# Altium PCB uart-v0.PcbDoc
Units mm, origin at the board's own origin, x right, y up, seen from the top; angles counter-clockwise.
Board outline 22.86 x 29.46 mm, 2 copper layers (Top Layer, Bottom Layer); 48 components, 15 nets, 143 pads, 0 vias.
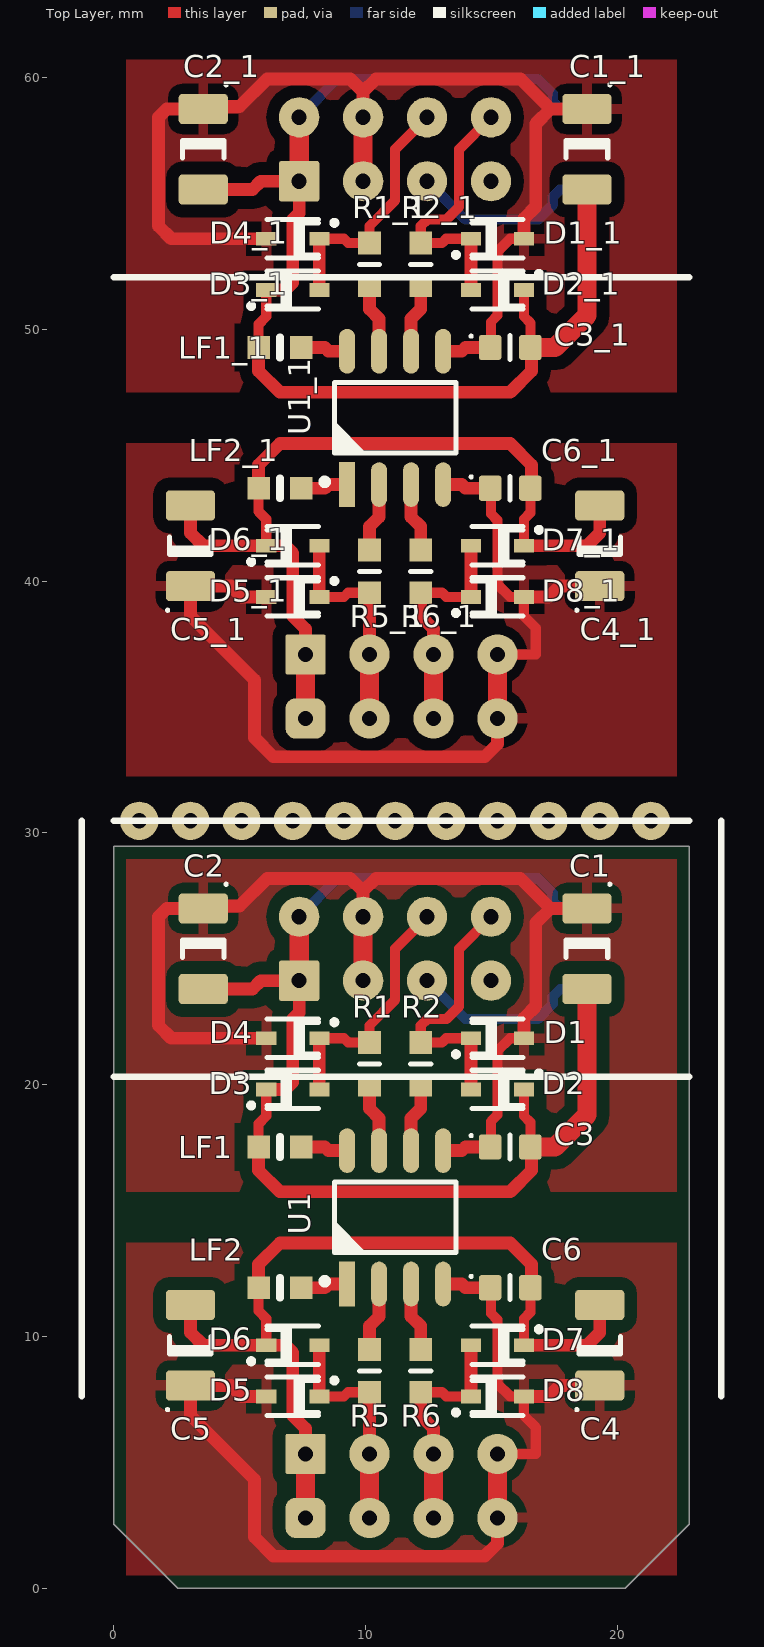
[diagram p0: Top Layer view]
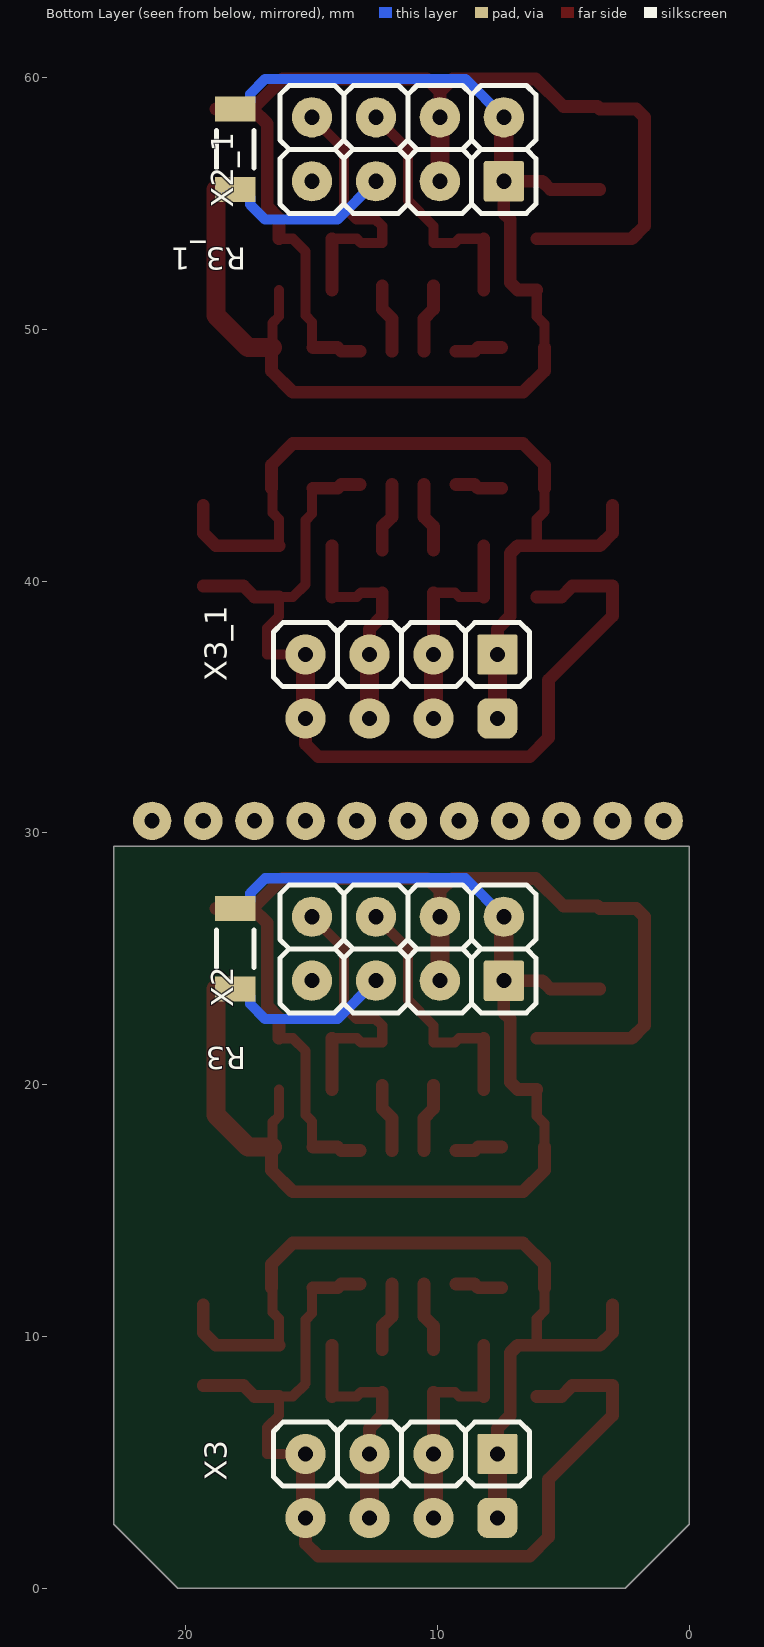
[diagram p1: Bottom Layer view, seen from below]

## Layer stack, top to bottom
Top Solder: solder mask 0.0102, Solder Resist, Dk 3.5
Top Layer: signal copper 0.0356
Dielectric 1: dielectric 0.32, FR-4, Dk 4.8
Bottom Layer: signal copper 0.0356
Bottom Solder: solder mask 0.0102, Solder Resist, Dk 3.5

## Board outline
0,2.54 0,29.464 22.86,29.464 22.86,2.54 20.32,0 2.54,0

## Design rules (kind name [scope] priority, off if disabled: settings)
Clearance [All] p1: gap=0.508 ignorepadtopadclearanceinfootprint=FALSE except(0: Arc-Hole Track-Hole SMDPad-Hole THPad-Hole Via-Hole Fill-Hole Poly-Hole Region-Hole Text-Hole; 0.254: Arc-SMDPad Arc-THPad Arc-Via Arc-Text Track-SMDPad Track-THPad Track-Via Track-Text SMDPad-SMDPad SMDPad-THPad SMDPad-Via SMDPad-Text THPad-THPad THPad-Via THPad-Text Via-Via Via-Text Fill-Text Poly-Text Region-Text Text-Text; 0.3: Arc-Arc Arc-Track Track-Track)
PolygonConnect [All] p1: connectstyle=Relief reliefconductorwidth=0.4 reliefentries=4 polygonreliefangle="90 Angle" airgapwidth=0.4
RoomDefinition uart-cut [InComponentClass('uart-cut')] p1: confinementstyle=ConfineOut formatcopy=TRUE lockcomponents=FALSE outline 97.663,-59.436 140.97,-59.436 140.97,-15.24 97.663,-15.24
RoutingVias [All] p1: holewidth=0.711 width=1.27 viastyle="Through Hole" minholewidth=0.711 minwidth=1.27 maxholewidth=0.711 maxwidth=1.27
SolderMaskExpansion [All] p1: expansion=0.102
Width [All] p1: maxlimit=2.54 minlimit=0.254 preferedwidth=0.508
30 further rules are at their usual default settings.

## Classes and differential pairs
component class uart-cut: C1 C2 C3 C4 C5 C6 D1 D2 D3 D4 D5 D6 D7 D8 LF1 LF2 R1 R2 R3 R5 R6 U1 X2 X3

## Components (designator, comment, footprint, x,y, rotation, side; value= is the part's Value field where it differs from the comment)
C1 "C12064.7u" CAP1206P 18.796,25.4 r270 top value=4.7u
C1_1 "C12064.7u" CAP1206P 18.796,57.15 r270 top value=4.7u (schematic designator C1)
C2 "C12064.7u" CAP1206P 3.556,25.4 r270 top value=4.7u
C2_1 "C12064.7u" CAP1206P 3.556,57.15 r270 top value=4.7u (schematic designator C2)
C3 "C0603100n" CAP0603P 15.748,17.526 r0 top value=100n
C3_1 "C0603100n" CAP0603P 15.748,49.276 r0 top value=100n (schematic designator C3)
C4 "C12064.7u" CAP1206P 19.304,9.652 r90 top value=4.7u
C4_1 "C12064.7u" CAP1206P 19.304,41.402 r90 top value=4.7u (schematic designator C4)
C5 "C12064.7u" CAP1206P 3.048,9.652 r90 top value=4.7u
C5_1 "C12064.7u" CAP1206P 3.048,41.402 r90 top value=4.7u (schematic designator C5)
C6 "C0603100n" CAP0603P 15.748,11.938 r0 top value=100n
C6_1 "C0603100n" CAP0603P 15.748,43.688 r0 top value=100n (schematic designator C6)
D1 "1N4148WS" DIOD-SOD323-2-A_V 15.24,19.812 r0 top value=100V
D1_1 "1N4148WS" DIOD-SOD323-2-A_V 15.24,51.562 r0 top value=100V (schematic designator D1)
D2 "1N4148WS" DIOD-SOD323-2-A_V 15.24,21.844 r180 top value=100V
D2_1 "1N4148WS" DIOD-SOD323-2-A_V 15.24,53.594 r180 top value=100V (schematic designator D2)
D3 "1N4148WS" DIOD-SOD323-2-A_V 7.112,19.812 r180 top value=100V
D3_1 "1N4148WS" DIOD-SOD323-2-A_V 7.112,51.562 r180 top value=100V (schematic designator D3)
D4 "1N4148WS" DIOD-SOD323-2-A_V 7.112,21.844 r0 top value=100V
D4_1 "1N4148WS" DIOD-SOD323-2-A_V 7.112,53.594 r0 top value=100V (schematic designator D4)
D5 "1N4148WS" DIOD-SOD323-2-A_V 7.112,9.652 r180 top value=100V
D5_1 "1N4148WS" DIOD-SOD323-2-A_V 7.112,41.402 r180 top value=100V (schematic designator D5)
D6 "1N4148WS" DIOD-SOD323-2-A_V 7.112,7.62 r0 top value=100V
D6_1 "1N4148WS" DIOD-SOD323-2-A_V 7.112,39.37 r0 top value=100V (schematic designator D6)
D7 "1N4148WS" DIOD-SOD323-2-A_V 15.24,9.652 r0 top value=100V
D7_1 "1N4148WS" DIOD-SOD323-2-A_V 15.24,41.402 r0 top value=100V (schematic designator D7)
D8 "1N4148WS" DIOD-SOD323-2-A_V 15.24,7.62 r180 top value=100V
D8_1 "1N4148WS" DIOD-SOD323-2-A_V 15.24,39.37 r180 top value=100V (schematic designator D8)
LF1 "FB0603100R" IND0603 6.604,17.526 r0 top value=100R
LF1_1 "FB0603100R" IND0603 6.604,49.276 r0 top value=100R (schematic designator LF1)
LF2 "FB0603100R" IND0603 6.604,11.938 r0 top value=100R
LF2_1 "FB0603100R" IND0603 6.604,43.688 r0 top value=100R (schematic designator LF2)
R1 "R060310R" RES0603 10.16,20.828 r270 top value=10R
R1_1 "R060310R" RES0603 10.16,52.578 r270 top value=10R (schematic designator R1)
R2 "R060310R" RES0603 12.192,20.828 r270 top value=10R
R2_1 "R060310R" RES0603 12.192,52.578 r270 top value=10R (schematic designator R2)
R3 "R120610k" RES1206 18.034,25.4 r270 bottom value=10k
R3_1 "R120610k" RES1206 18.034,57.15 r270 bottom value=10k (schematic designator R3)
R5 "R060310R" RES0603 10.16,8.636 r270 top value=10R
R5_1 "R060310R" RES0603 10.16,40.386 r270 top value=10R (schematic designator R5)
R6 "R060310R" RES0603 12.192,8.636 r270 top value=10R
R6_1 "R060310R" RES0603 12.192,40.386 r270 top value=10R (schematic designator R6)
U1 "ADUM1201" SOIC-8 11.176,14.732 r90 top
U1_1 "ADUM1201" SOIC-8 11.176,46.482 r90 top (schematic designator U1)
X2 "DS1021-2x4" PLS-2X4 11.176,25.4 r0 bottom value="2.54 mm"
X2_1 "DS1021-2x4" PLS-2X4 11.176,57.15 r0 bottom value="2.54 mm" (schematic designator X2)
X3 "DS1021-1x4" PLS-1X4 11.43,5.334 r0 bottom value="2.54 mm"
X3_1 "DS1021-1x4" PLS-1X4 11.43,37.084 r0 bottom value="2.54 mm" (schematic designator X3)

## Footprints (in the part's own frame and the unit in brackets; to place one, negate y for a bottom-side part, rotate by r counter-clockwise, add the part's x,y. Pads: shape width x height; smd on the part's side, far side on the other; paste and mask are expansions set on the pad)
CAP0603P [mm] "Chip Capacitor, 2-Leads, Body 1,60x0,80mm, IPC Medium Density"
  rrect25% 0.9x1 smd: 1(-0.8,0) 2(0.8,0)
  silkscreen extent -1.6,-0.48 0,0.5, body extent -0.85,-0.45 0.85,0.45, height 0.9
CAP1206P [mm] "Chip Capacitor, 2-Leads, Body 3,20x1,60mm, IPC Medium Density"
  rrect25% 1.2x1.95 smd: 1(-1.6,0) 2(1.6,0)
  silkscreen extent -2.61,-0.82 0.35,0.96, body extent -1.7,-0.9 1.7,0.9, height 1.8
DIOD-SOD323-2-A_V [mm]
  rect 0.8x0.55 smd: 1(-1.055,0) 2(1.055,0)
  silkscreen extent -1.02,-0.76 1.75,0.76, body extent -0.85,-0.65 0.85,0.65, height 1
IND0603 [mm] "Chip Inductor, 2-Leads, Body 1,75x0,95mm, IPC Medium Density"
  rect 0.9x0.9 smd: 1(-0.85,0) 2(0.85,0)
  silkscreen extent 0,-0.4 0,0.4, body extent -0.87,-0.4 0.87,0.4, height 0.9
PLS-1X4 [mm]
  rrect10% 1.6x1.6 hole 0.6: 1(-3.81,0)
  round 1.6 hole 0.6: 2(-1.27,0) 3(1.27,0) 4(3.81,0)
  silkscreen extent -5.08,-1.26 5.09,1.28, body extent -5.08,-1.26 5.09,1.28, height 8.5
PLS-2X4 [mm]
  rrect10% 1.6x1.6 hole 0.6: 1(-3.81,1.27)
  round 1.6 hole 0.6: 2(-3.81,-1.27) 3(-1.27,1.27) 4(-1.27,-1.27) 5(1.27,1.27) 6(1.27,-1.27) 7(3.81,1.27) 8(3.81,-1.27)
  silkscreen extent -5.08,-2.53 5.09,2.55, body extent -5.08,-2.53 5.09,2.55, height 8.5
RES0603 [mm] "Chip Resistor, 2-Leads, Body 1,75x0,95mm, IPC Medium Density"
  rect 0.9x0.9 smd: 1(-0.85,0) 2(0.85,0)
  silkscreen extent 0,-0.4 0,0.4, body extent -0.87,-0.4 0.87,0.4, height 0.55
RES1206 [mm] "Chip Resistor, 2-Leads, Body 3,13x1,55mm, IPC Medium Density"
  rect 1x1.6 smd: 1(-1.6,0) 2(1.6,0)
  silkscreen extent -0.75,-0.75 0.75,0.75, body extent -1.63,-0.8 1.63,0.8, height 0.7
SOIC-8 [mm] "SOIC, 8-Leads, Body 4,90x3,95mm, Pitch 1,27mm, IPC Medium Density"
  rect 1.778x0.635 smd: 1(-2.65,1.905)
  oval 1.778x0.635 smd: 2(-2.65,0.635) 3(-2.65,-0.635) 4(-2.65,-1.905) 5(2.65,-1.905) 6(2.65,-0.635) 7(2.65,0.635) 8(2.65,1.905)
  silkscreen extent -2.66,-2.41 1.4,2.92, body extent -2.03,-2.41 2.03,2.41, height 1.7

## Part data
C1 C1_1 C2 C2_1 C4 C4_1 C5 C5_1: library part C1206, "C1206 10% 25V", Manufacturer=Yageo, ManufacturerPartNumber=CC1206KKX7R9BB475, Package=1206, Power/Voltage=50V, Tolerance=10%, Category=Capacitor, Name=C1206, Pads=2
C3 C3_1 C6 C6_1: library part C0603, "C0603 10% 25V", Manufacturer=Yageo, ManufacturerPartNumber=CC0603KRX5R8BB104, Package=0603, Power/Voltage=25V, Tolerance=10%, Category=Capacitor, Name=C0603, Pads=2
D1 D1_1 D2 D2_1 D3 D3_1 D4 D4_1 D5 D5_1 D6 D6_1 D7 D7_1 D8 D8_1: "Fast Switching Diode, 75 V, 0.3 A, -65 to 150 degC, 2-Pin SOD323, RoHS, Tape and Reel", Manufacturer=Diodes, ManufacturerPartNumber=1N4148WS-7-F, Package=SOD-323F, Power/Voltage=0.1A, Category=Diode, ComponentLink1Description=Datasheet, ComponentLink1URL=https://www.terraelectronica.ru/pdf/show?pdf_file=http%253A%252F%252Fwww.farnell.com%252Fdatasheets%252F1693646.pdf, Name=1N4148WS, Pads=2
LF1 LF1_1 LF2 LF2_1: library part FB0603, "BEAD0603 25% 100R @100MHz 2.0A 45mR", Manufacturer="Murata Electronics", ManufacturerPartNumber=BLM18EG101TN1D, Package=0603, Power/Voltage=2.0A, Tolerance=25%, Category="Ferrite bead", ComponentLink1Description=Datasheet, ComponentLink1URL=https://nsk.terraelectronica.ru/pdf/show?pdf_file=http%253A%252F%252Fwww.farnell.com%252Fdatasheets%252F5169.pdf, Name=FB0603, Pads=2
R1 R1_1 R2 R2_1 R5 R5_1 R6 R6_1: library part R0603, "R0603 5%", Manufacturer=Yageo, ManufacturerPartNumber=RC0603JR-0710RL, Package=0603, Power/Voltage=0.125W, Tolerance=5%, Category=Resistor, Name=R0603, Pads=2
R3 R3_1: library part R1206, "R1206 5%", Manufacturer=Yageo, ManufacturerPartNumber=RC1206FR-0710KL, Package=1206, Power/Voltage=0.25W, Tolerance=1%, Category=Resistor, Name=R1206, Pads=2
U1 U1_1: "RX/TX Isolation 5V 1MHz", Manufacturer="Analog Devices", ManufacturerPartNumber=ADUM1201ARZ, Package=SOIC-8, Power/Voltage=5V, Category="Communication IC", ComponentLink1Description=Datasheet, ComponentLink1URL=https://datasheet.octopart.com/ADUM1201ARZ-RL7-Analog-Devices-datasheet-11537988.pdf, Name=ADUM1201, Pads=8
X2 X2_1: library part "PLS 2x4", "Pinout 2x2", Manufacturer=Connfly, Package=PLS, Power/Voltage=50V, Category="Connector TH", ManufacturerPartNumber=DS1021-2x4, Name=DS1021-2, Pads=8
X3 X3_1: library part "PLS 1x4", "Standard PLS pinout", Manufacturer=Connfly, Package=PLS, Power/Voltage=50V, Category="Connector TH", ManufacturerPartNumber=DS1021-1x4, Name=DS1021, Pads=4

## Free pads (board coordinates)
  rrect50% 1.6x1.6 hole 0.6: 2(7.62,2.794) 2(7.62,34.544)
  round 1.6 hole 0.6: 2(10.16,2.794) 2(10.16,34.544) 2(12.7,2.794) 2(12.7,34.544) 2(15.24,2.794) 2(15.24,34.544)
  round 1.524 hole 0.6: 3(1.016,30.48) 3(3.048,30.48) 3(5.08,30.48) 3(7.112,30.48) 3(9.144,30.48) 3(11.176,30.48) 3(13.208,30.48) 3(15.24,30.48) 3(17.272,30.48) 3(19.304,30.48) 3(21.336,30.48)

## Nets (pads, with @x,y where several pads share a name; then routed paths per layer and width w, separated by ;. In a path a pad name is that pad's centre, name@x,y a point inside that pad or via, vN(x,y) a via of type N, cw(c..) or ccw(c..) an arc to the next point about the centre after c; other vN are vias at no path point)
COM0V: C4.1 C5.1 C6.1 D6.1 D8.1 pad.2@15.24,2.794 U1.4 X3.4 | length 38.3
  Top Layer w0.406: C6.1 14.986,11.9 14.986,10.922 15.24,10.668 15.24,8.128 15.748,7.62 D8.1 16.295,6.857 16.764,6.388 16.764,5.334 X3.4
  Top Layer w0.508: D6.1 5.08,7.62 4.648,8.052 C5.1 3.048,6.858 5.588,4.318 5.588,2.032 6.35,1.27 14.732,1.27 15.24,1.778 pad.2@15.24,2.794 ; U1.4 13.826,12.082 13.97,11.938 C6.1 ; D8.1 17.272,7.62 17.704,8.052 C4.1
  Top Layer w0.762: pad.2@15.24,2.794 X3.4
COM5V: C4.2 C5.2 C6.2 D5.2 D7.2 LF2.1 pad.2@7.62,2.794 X3.1 | length 34.8
  Top Layer w0.406: LF2.1 5.754,11.01 6.057,10.707 D5.2 ; D7.2 16.295,10.707 16.548,10.96 C6.2
  Top Layer w0.508: C5.2 3.048,10.16 3.556,9.652 D5.2 6.814,9.652 7.112,9.354 7.112,6.858 7.62,6.35 X3.1 ; LF2.1 5.754,12.866 6.604,13.716 15.748,13.716 16.598,12.866 C6.2@16.598,11.938 ; D7.2 18.796,9.652 19.304,10.16 C4.2
  Top Layer w0.762: pad.2@7.62,2.794 X3.1
COM-RX: D5.1 D6.2 pad.2@10.16,2.794 R5.2 X3.2 | length 9.1
  Top Layer w0.406: D6.2 9.144,7.62 9.31,7.786 R5.2
  Top Layer w0.508: D6.2 D5.1 ; X3.2 R5.2
  Top Layer w0.762: pad.2@10.16,2.794 X3.2
COM-TX: D7.1 D8.2 pad.2@12.7,2.794 R6.2 X3.3 | length 9.3
  Top Layer w0.406: R6.2 13.042,7.786 13.207,7.621 D8.2@14.184,7.621
  Top Layer w0.508: R6.2 12.192,6.858 12.7,6.35 X3.3 ; D8.2 D7.1
  Top Layer w0.762: pad.2@12.7,2.794 X3.3
D2GND: C1.1 C2.1 C3.1 D2.1 D4.1 U1.5 X2.3 X2.4 | length 43.6
  Top Layer w0.406: C3.1 14.986,17.564 14.986,18.542 15.24,18.796 15.24,21.336 15.748,21.844 D2.1
  Top Layer w0.508: D4.1 2.286,21.844 1.778,22.352 1.778,26.67 2.108,27 C2.1 3.649,27.093 4.995,27.093 6.096,28.194 9.398,28.194 9.906,27.686 ; X2.4 9.906,27.686 ; U1.5 13.826,17.382 13.97,17.526 C3.1 ; D2.1 16.295,22.645 16.764,23.114 16.764,26.416 17.348,27 ; C1.1 17.348,27 ; 9.906,27.686 10.414,28.194 16.154,28.194 17.348,27
  Top Layer w0.762: X2.3 X2.4
D2VCC: C1.2 C2.2 C3.2 D1.2 D3.2 LF1.1 R3.1 X2.1 X2.2 | length 49.7
  Top Layer w0.406: LF1.1 5.754,18.454 6.057,18.757 D3.2 ; D1.2 16.295,18.757 16.548,18.504 C3.2
  Top Layer w0.508: C2.2 5.512,23.8 5.842,24.13 X2.1 7.366,22.86 7.112,22.606 7.112,20.11 6.814,19.812 D3.2 ; LF1.1 5.754,16.598 6.604,15.748 15.748,15.748 16.598,16.598 C3.2@16.598,17.526
  Top Layer w0.762: X2.1 X2.2 ; C3.2 16.598,17.526 17.526,17.526 18.796,18.796 C1.2
  Bottom Layer w0.406: X2.2 8.89,28.194 16.84,28.194 17.437,27.597 17.437,27.297 17.734,27 R3.1
MCU-RST: R3.2 X2.5 | length 6.9
  Bottom Layer w0.406: X2.5 13.97,22.606 16.84,22.606 17.437,23.203 17.437,23.503 17.734,23.8 R3.2
MCU-RX: D1.1 D2.2 R2.1 X2.8 | length 10.7
  Top Layer w0.406: D2.2@14.184,21.843 13.207,21.843 13.042,21.678 R2.1 12.192,22.352 12.446,22.606 13.208,22.606 13.716,23.114 13.716,25.4 X2.8
  Top Layer w0.508: D1.1 D2.2
MCU-TX: D3.1 D4.2 R1.1 X2.6 | length 10
  Top Layer w0.406: D4.2 9.144,21.844 9.31,21.678 R1.1 10.16,22.352 11.176,23.368 11.176,25.4 X2.6
  Top Layer w0.508: D3.1 D4.2
NetLF1_2: LF1.2 U1.8 | length 1.9
  Top Layer w0.508: LF1.2 8.382,17.526 8.526,17.382 U1.8
NetLF2_2: LF2.2 U1.1 | length 1.9
  Top Layer w0.508: LF2.2 8.382,11.938 8.526,12.082 U1.1
NetR1_2: R1.2 U1.7 | length 2.8
  Top Layer w0.508: R1.2 10.16,19.05 10.541,18.669 U1.7
NetR2_2: R2.2 U1.6 | length 2.8
  Top Layer w0.508: U1.6 11.811,18.669 12.192,19.05 R2.2
NetR5_1: R5.1 U1.2 | length 2.8
  Top Layer w0.508: R5.1 10.16,10.414 10.541,10.795 U1.2
NetR6_1: R6.1 U1.3 | length 2.8
  Top Layer w0.508: U1.3 11.811,10.795 12.192,10.414 R6.1
pads on no net: C1_1.1 C1_1.2 C2_1.1 C2_1.2 C3_1.1 C3_1.2 C4_1.1 C4_1.2 C5_1.1 C5_1.2 C6_1.1 C6_1.2 D1_1.1 D1_1.2 D2_1.1 D2_1.2 D3_1.1 D3_1.2 D4_1.1 D4_1.2 D5_1.1 D5_1.2 D6_1.1 D6_1.2 D7_1.1 D7_1.2 D8_1.1 D8_1.2 LF1_1.1 LF1_1.2 LF2_1.1 LF2_1.2 R1_1.1 R1_1.2 R2_1.1 R2_1.2 R3_1.1 R3_1.2 R5_1.1 R5_1.2 R6_1.1 R6_1.2 U1_1.1 U1_1.2 U1_1.3 U1_1.4 U1_1.5 U1_1.6 U1_1.7 U1_1.8 X2.7 X2_1.1 X2_1.2 X2_1.3 X2_1.4 X2_1.5 X2_1.6 X2_1.7 X2_1.8 X3_1.1 X3_1.2 X3_1.3 X3_1.4
copper on no net: | length 227.2
  Top Layer w0.406: 5.754,43.688 5.754,42.76 6.057,42.457 6.057,41.402 ; 5.754,49.276 5.754,50.204 6.057,50.507 6.057,51.562 ; 8.167,39.37 9.144,39.37 9.31,39.536 10.16,39.536 ; 8.167,53.594 9.144,53.594 9.31,53.428 10.16,53.428 10.16,54.102 11.176,55.118 11.176,57.15 12.446,58.42 ; 12.192,39.536 13.042,39.536 13.207,39.371 14.184,39.371 ; 14.184,53.593 13.207,53.593 13.042,53.428 12.192,53.428 12.192,54.102 12.446,54.356 13.208,54.356 13.716,54.864 13.716,57.15 14.986,58.42 ; 14.948,43.688 14.986,43.65 14.986,42.672 15.24,42.418 15.24,39.878 15.748,39.37 16.295,39.37 16.295,38.607 16.764,38.138 16.764,37.084 15.24,37.084 ; 14.948,49.276 14.986,49.314 14.986,50.292 15.24,50.546 15.24,53.086 15.748,53.594 16.295,53.594 ; 16.295,41.402 16.295,42.457 16.548,42.71 16.548,43.688 ; 16.295,51.562 16.295,50.507 16.548,50.254 16.548,49.276
  Top Layer w0.508: 3.048,43.002 3.048,41.91 3.556,41.402 6.057,41.402 6.814,41.402 7.112,41.104 7.112,38.608 7.62,38.1 7.62,37.084 ; 3.556,55.55 5.512,55.55 5.842,55.88 7.366,55.88 7.366,54.61 7.112,54.356 7.112,51.86 6.814,51.562 6.057,51.562 ; 5.754,43.688 5.754,44.616 6.604,45.466 15.748,45.466 16.598,44.616 16.598,43.688 ; 5.754,49.276 5.754,48.348 6.604,47.498 15.748,47.498 16.598,48.348 16.598,49.276 ; 6.057,39.37 5.08,39.37 4.648,39.802 3.048,39.802 3.048,38.608 5.588,36.068 5.588,33.782 6.35,33.02 14.732,33.02 15.24,33.528 15.24,34.544 ; 6.057,53.594 2.286,53.594 1.778,54.102 1.778,58.42 2.108,58.75 3.556,58.75 3.649,58.843 4.995,58.843 6.096,59.944 9.398,59.944 9.906,59.436 ; 7.454,43.688 8.382,43.688 8.526,43.832 9.271,43.832 ; 7.454,49.276 8.382,49.276 8.526,49.132 9.271,49.132 ; 8.167,39.37 8.167,41.402 ; 8.167,51.562 8.167,53.594 ; 9.906,58.42 9.906,59.436 ; 10.16,37.084 10.16,39.536 ; 10.16,41.236 10.16,42.164 10.541,42.545 10.541,43.832 ; 10.16,51.728 10.16,50.8 10.541,50.419 10.541,49.132 ; 11.811,43.832 11.811,42.545 12.192,42.164 12.192,41.236 ; 11.811,49.132 11.811,50.419 12.192,50.8 12.192,51.728 ; 12.192,39.536 12.192,38.608 12.7,38.1 12.7,37.084 ; 13.081,43.832 13.826,43.832 13.97,43.688 14.948,43.688 ; 13.081,49.132 13.826,49.132 13.97,49.276 14.948,49.276 ; 14.185,39.37 14.185,41.402 ; 14.185,51.562 14.185,53.594 ; 16.295,39.37 17.272,39.37 17.704,39.802 19.304,39.802 ; 16.295,41.402 18.796,41.402 19.304,41.91 19.304,43.002 ; 16.295,53.594 16.295,54.395 16.764,54.864 16.764,58.166 17.348,58.75 ; 18.796,58.75 17.348,58.75 ; 9.906,59.436 10.414,59.944 16.154,59.944 17.348,58.75
  Top Layer w0.762: 7.366,55.88 7.366,58.42 ; 7.62,34.544 7.62,37.084 ; 9.906,55.88 9.906,58.42 ; 10.16,34.544 10.16,37.084 ; 12.7,34.544 12.7,37.084 ; 15.24,34.544 15.24,37.084 ; 16.548,49.276 16.598,49.276 17.526,49.276 18.796,50.546 18.796,55.55
  Bottom Layer w0.406: 7.366,58.42 8.89,59.944 16.84,59.944 17.437,59.347 17.437,59.047 17.734,58.75 18.034,58.75 ; 12.446,55.88 13.97,54.356 16.84,54.356 17.437,54.953 17.437,55.253 17.734,55.55 18.034,55.55

## Polygon pours and split planes (outlines as drawn)
no net on Top Layer "NONET_L01_P009" (solid, remove dead copper, pour order 9): 0.508,60.706 22.352,60.706 22.352,47.498 0.508,47.498
no net on Top Layer "NONET_L01_P007" (solid, remove dead copper, pour order 7): 0.508,32.258 22.352,32.258 22.352,45.466 0.508,45.466
COM0V on Top Layer "COM0V_L01_P001" (solid, remove dead copper, pour order 1): 0.508,0.508 22.352,0.508 22.352,13.716 0.508,13.716
D2GND on Top Layer "D2GND_L01_P000" (solid, remove dead copper, pour order 0): 0.508,28.956 22.352,28.956 22.352,15.748 0.508,15.748

## Silkscreen, mask and mechanical layers (free items; w line width, h text height)
Top Overlay:
  lines w0.254: -1.27,7.62 -1.27,30.48 ; 0,20.32 22.86,20.32 ; 0,30.48 22.86,30.48 ; 0,52.07 22.86,52.07 ; 24.13,7.62 24.13,30.48
Board:
  lines w0.254: 0,2.54 0,19.05 0,21.59 0,29.464 22.86,29.464 22.86,21.59 22.86,19.05 22.86,2.54 20.32,0 2.54,0 0,2.54 ; 0,34.29 2.54,31.75 20.32,31.75 22.86,34.29 22.86,50.8 22.86,53.34 22.86,61.214 0,61.214 0,53.34 0,50.8 0,34.29